# EAGLE board Castle_2_2_2_060623 (EAGLE 9.3.0)
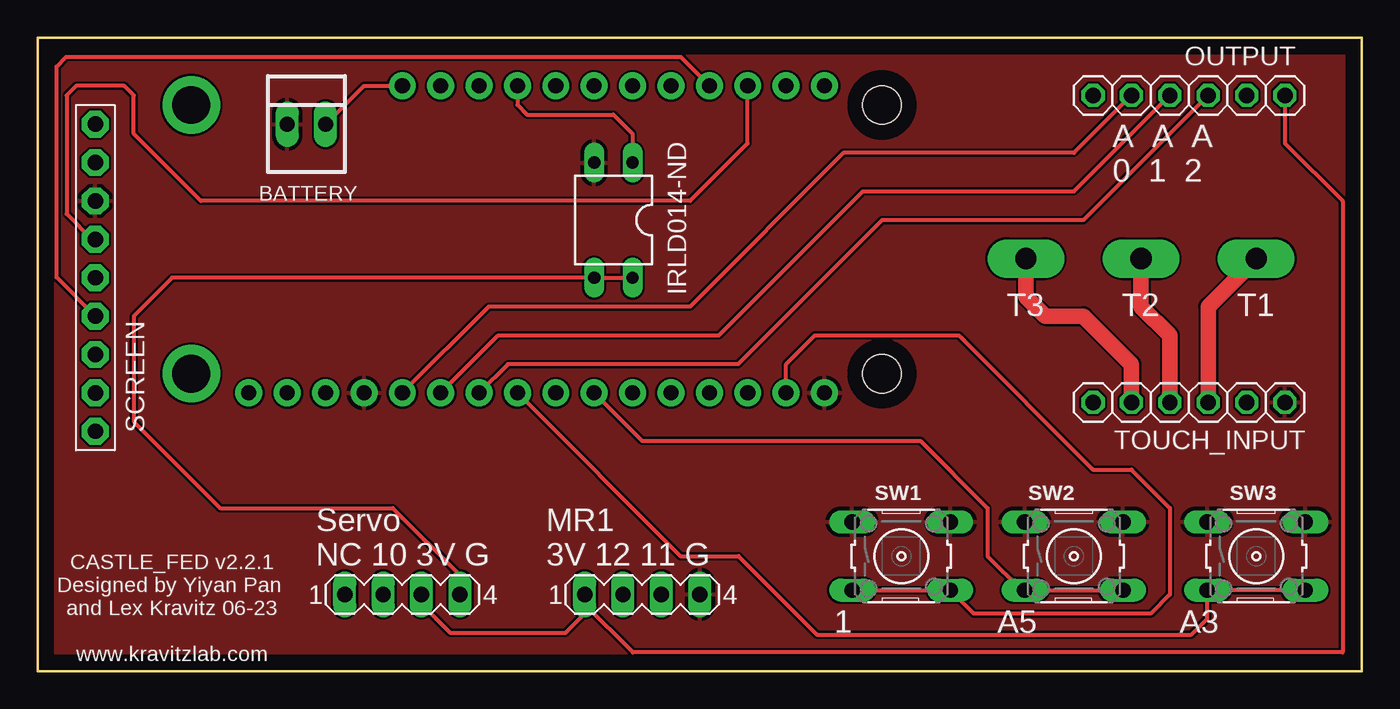
[diagram p0: board, top side]
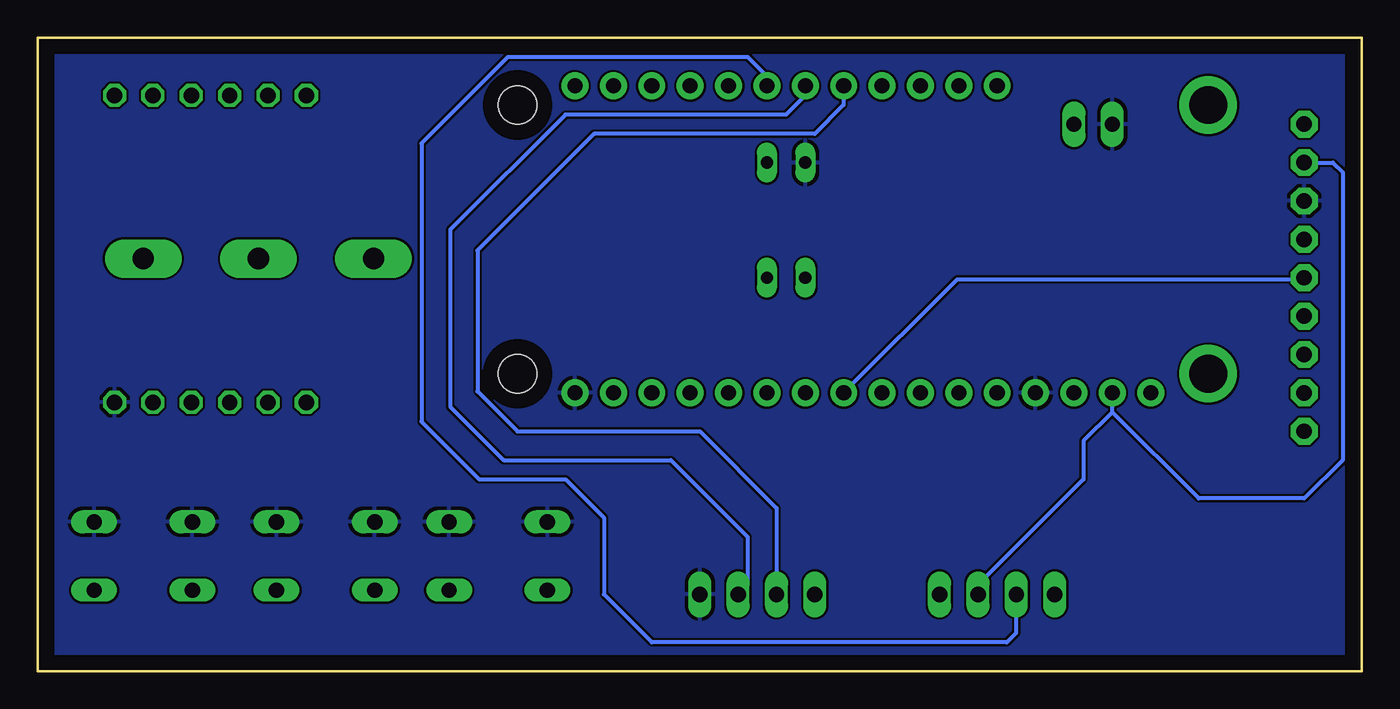
[diagram p1: board, bottom side, seen from below]

Size 87.63 x 41.91 mm. Coordinates in mm from the lower left corner, seen from the top.
Outline: 0,41.91 87.63,41.91 87.63,0 0,0 0,41.91
Copper layers (1*16): Top 0.035mm / dielectric 1.5mm / Bottom 0.035mm
Design rules "default": minimum track width 6mil, minimum drill 0.35mm, track to track 6mil, track to pad 6mil, pad to pad 6mil, via to via 6mil, smd to smd 6mil, copper to edge 40mil, drill to drill 6mil, minimum pad ring 10mil, minimum via ring 8mil, stop-mask expansion 4mil, vias tented up to drill 0mil, thermal gap 10mil

## Footprints (pad centres in the part's own frame; a part is rotated, then mirrored left to right if it is on the bottom)
22-23-2021 = drill 1 long: 1 -1.27,0; 2 1.27,0
1X1-BIGPOGO = drill 1.4 pad 2.54 long: P$1 0,0
DIL04 = drill 0.813 long: 1 -1.27,-3.81; 2 1.27,-3.81; 3 1.27,3.81; 4 -1.27,3.81
MA04-1 = drill 1.016 long: 1 -3.81,0; 2 -1.27,0; 3 1.27,0; 4 3.81,0
FEATHERWING_DIM = drill 1 pad 1.778: 1 6.35,1.27; 2 8.89,1.27; 3 11.43,1.27; 4 13.97,1.27; 5 16.51,1.27; 6 19.05,1.27; 7 21.59,1.27; 8 24.13,1.27; 9 26.67,1.27; 10 29.21,1.27; 11 31.75,1.27; 12 34.29,1.27; 13 36.83,1.27; 14 39.37,1.27; 15 41.91,1.27; 16 44.45,1.27; 17 44.45,21.59; 18 41.91,21.59; 19 39.37,21.59; 20 36.83,21.59; 21 34.29,21.59; 22 31.75,21.59; 23 29.21,21.59; 24 26.67,21.59; 25 24.13,21.59; 26 21.59,21.59; 27 19.05,21.59; 28 16.51,21.59 | drill 2.5 pad 3.81: P$1 2.54,20.32; P$2 2.54,2.54 | hole 2.54: 48.26,20.32; 48.26,2.54
1X06 = drill 1.016 octagon: 1 -6.35,0; 2 -3.81,0; 3 -1.27,0; 4 1.27,0; 5 3.81,0; 6 6.35,0
1X09-BIG = drill 1.016 pad 1.778 octagon: 1 -10.16,0; 2 -7.62,0; 3 -5.08,0; 4 -2.54,0; 5 0,0; 6 2.54,0; 7 5.08,0; 8 7.62,0; 9 10.16,0
B3F-10XX = drill 1.016 long: 1 -3.251,2.261; 2 3.251,2.261; 3 -3.251,-2.261; 4 3.251,-2.261

## Placement (x,y rotation side)
BATTERY  22-23-2021  [22-23-2021]  17.78,36.2 0 top
EXTRAGND  [1X1-BIGPOGO]  80.64,27.3 0 top
EXTRAGND1  [1X1-BIGPOGO]  73.02,27.3 0 top
EXTRAGND2  [1X1-BIGPOGO]  65.41,27.3 0 top
IRLD014-ND  IRFD9210  [DIL04]  38.1,29.85 180 top
MOUSERAT  [MA04-1]  40,5.08 0 top
MS2  FEATHERWING_NODIM  [FEATHERWING_DIM]  7.62,17.15 0 top
OUTPUT  [1X06]  76.2,38.1 180 top
SCREEN  [1X09-BIG]  3.81,26.04 90 top
SERVO  [MA04-1]  24.13,5.08 0 top
SW1  [B3F-10XX]  57.15,7.62 0 top
SW2  [B3F-10XX]  68.58,7.62 0 top
SW3  [B3F-10XX]  80.64,7.62 0 top
TOUCH_INPUT  [1X06]  76.2,17.78 180 top

## Library data of the parts
BATTERY = con-molex; MF: MOLEX; MPN: 22-23-2021; OC_FARNELL: 1462926; OC_NEWARK: 25C3832
EXTRAGND EXTRAGND1 EXTRAGND2 MS2 OUTPUT SCREEN TOUCH_INPUT = adafruit
IRLD014-ND = transistor-fet
MOUSERAT SERVO = con-lstb; OC_FARNELL: unknown; OC_NEWARK: unknown
SW1-SW3 = buttons

## Nets
0: MS2.14
1: MS2.15 SW1.3 SW1.4
3V: MOUSERAT.1 MS2.2 OUTPUT.1 SCREEN.8 SERVO.3
5: MS2.19 SCREEN.6
6: MS2.20 SCREEN.4
10: MS2.22 SERVO.2
11: MOUSERAT.3 MS2.23
12: MOUSERAT.2 MS2.24
13: IRLD014-ND.1 MS2.25
A0: MS2.5 OUTPUT.5
A1: MS2.6 OUTPUT.4
A2: MS2.7 OUTPUT.3
A3: MS2.8 SW3.3 SW3.4
A4: MS2.9 SCREEN.5
A5: MS2.10 SW2.3 SW2.4
EN: MS2.27
GND: BATTERY.1 IRLD014-ND.2 MOUSERAT.4 MS2.4 MS2.16 SCREEN.7 SW1.1 SW1.2 SW2.1 SW2.2 SW3.1 SW3.2 TOUCH_INPUT.1
MOSFET_GND: IRLD014-ND.3 IRLD014-ND.4 SERVO.4
TOUCH1: EXTRAGND.P$1 TOUCH_INPUT.3
TOUCH2: EXTRAGND1.P$1 TOUCH_INPUT.4
TOUCH3: EXTRAGND2.P$1 TOUCH_INPUT.5
VBAT: BATTERY.2 MS2.28

## Tracks (layer width: path | path; a pad name or v marks a point on that pad's centre or on a via)
1
  Top 0.254: MS2.15 49.53,20.32 51.43,22.23 60.96,22.23 69.85,13.34 72.39,13.34 74.93,10.8 74.93,5.08 73.66,3.81 61.95,3.81 SW1.4 SW1.3
3V
  Top 0.254: OUTPUT.1 82.55,34.93 86.36,31.12 86.36,1.25 39.39,1.25 36.19,4.45 | SERVO.3 25.4,4.45 27.3,2.54 34.92,2.54 36.19,3.81 MOUSERAT.1
  Top 0.305: 36.19,4.45 MOUSERAT.1
  Bottom 0.254: SCREEN.8 1.9,33.66 1.27,33.02 1.27,13.97 3.81,11.43 10.79,11.43 16.51,17.15 | 16.51,17.15 MS2.2 | 16.51,17.15 18.41,15.24 18.41,12.7 25.4,5.72 SERVO.3
5
  Top 0.254: MS2.19 46.99,34.93 43.18,31.12 10.79,31.12 6.35,35.56 6.35,38.1 5.71,38.74 2.54,38.74 1.9,38.1 1.9,30.25 3.58,28.57 SCREEN.6
6
  Top 0.254: SCREEN.4 1.24,26.06 1.24,40.01 1.88,40.64 42.55,40.64 MS2.20
10
  Bottom 0.254: MS2.22 39.37,39.37 40.64,40.64 56.52,40.64 62.23,34.93 62.23,16.51 58.42,12.7 52.7,12.7 50.16,10.16 50.16,5.08 46.99,1.91 23.5,1.91 22.86,2.54 SERVO.2
11
  Bottom 0.254: MOUSERAT.3 40.64,5.72 40.64,8.89 45.72,13.97 56.79,13.97 60.32,17.51 60.32,29.21 52.7,36.83 38.1,36.83 36.83,38.1 MS2.23
12
  Bottom 0.254: MS2.24 34.29,37.46 36.19,35.56 50.8,35.56 58.52,27.84 58.52,18.52 55.88,15.88 43.81,15.88 38.73,10.8 MOUSERAT.2
13
  Top 0.254: MS2.25 31.75,37.46 32.39,36.83 38.1,36.83 39.37,35.56 IRLD014-ND.1
A0
  Top 0.254: OUTPUT.5 68.58,34.29 53.34,34.29 43.18,24.13 29.84,24.13 MS2.5
A1
  Top 0.254: MS2.6 30.48,22.23 45.08,22.23 54.61,31.75 68.58,31.75 OUTPUT.4
A2
  Top 0.254: OUTPUT.3 69.21,29.85 55.88,29.85 46.36,20.32 31.11,20.32 MS2.7
A3
  Top 0.254: SW3.4 SW3.3 77.39,3.45 76.35,2.41 51.59,2.41 46.38,7.62 42.55,7.62 MS2.8
A4
  Bottom 0.254: SCREEN.5 3.91,25.93 26.77,25.93 MS2.9
A5
  Top 0.254: MS2.10 40,15.24 58.42,15.24 62.86,10.8 62.86,7.62 65.13,5.36 SW2.3 SW2.4
GND
  pour Top: -38.73,50.16 95.88,50.16 95.88,-4.45 -38.73,-4.45
  pour Bottom: -40.01,50.16 96.52,50.16 96.52,-4.45 -40.01,-4.45
MOSFET_GND
  Top 0.254: IRLD014-ND.4 IRLD014-ND.3 8.89,26.04 6.35,23.5 6.35,16.51 12.06,10.8 23.5,10.8 27.94,6.35 SERVO.4
TOUCH1
  Top 1.016: EXTRAGND.P$1 77.47,24.13 TOUCH_INPUT.3
TOUCH2
  Top 1.016: EXTRAGND1.P$1 73.02,24.13 74.93,22.23 TOUCH_INPUT.4
TOUCH3
  Top 1.016: TOUCH_INPUT.5 72.39,20.32 69.21,23.5 66.67,23.5 65.41,24.77 EXTRAGND2.P$1
VBAT
  Top 0.254: BATTERY.2 21.59,38.74 MS2.28

## Text on the board
tNames: A A A / 0 1 2 | T3 | T2 | T1 | Servo / NC 10 3V G | MR1 / 3V 12 11 G | 1 | A5 | A3 | CASTLE_FED v2.2.1 / Designed by Yiyan Pan / and Lex Kravitz 06-23 / / www.kravitzlab.com